# Altium PCB ALTIUM.PCBDOC
Units mm, origin at the board's own origin, x right, y up, seen from the top; angles counter-clockwise.
Board outline 109.8 x 50 mm, 2 copper layers (Top Layers, Bottom Layer), stack 1.62 mm thick; 3 components, 0 nets, 0 pads, 0 vias.
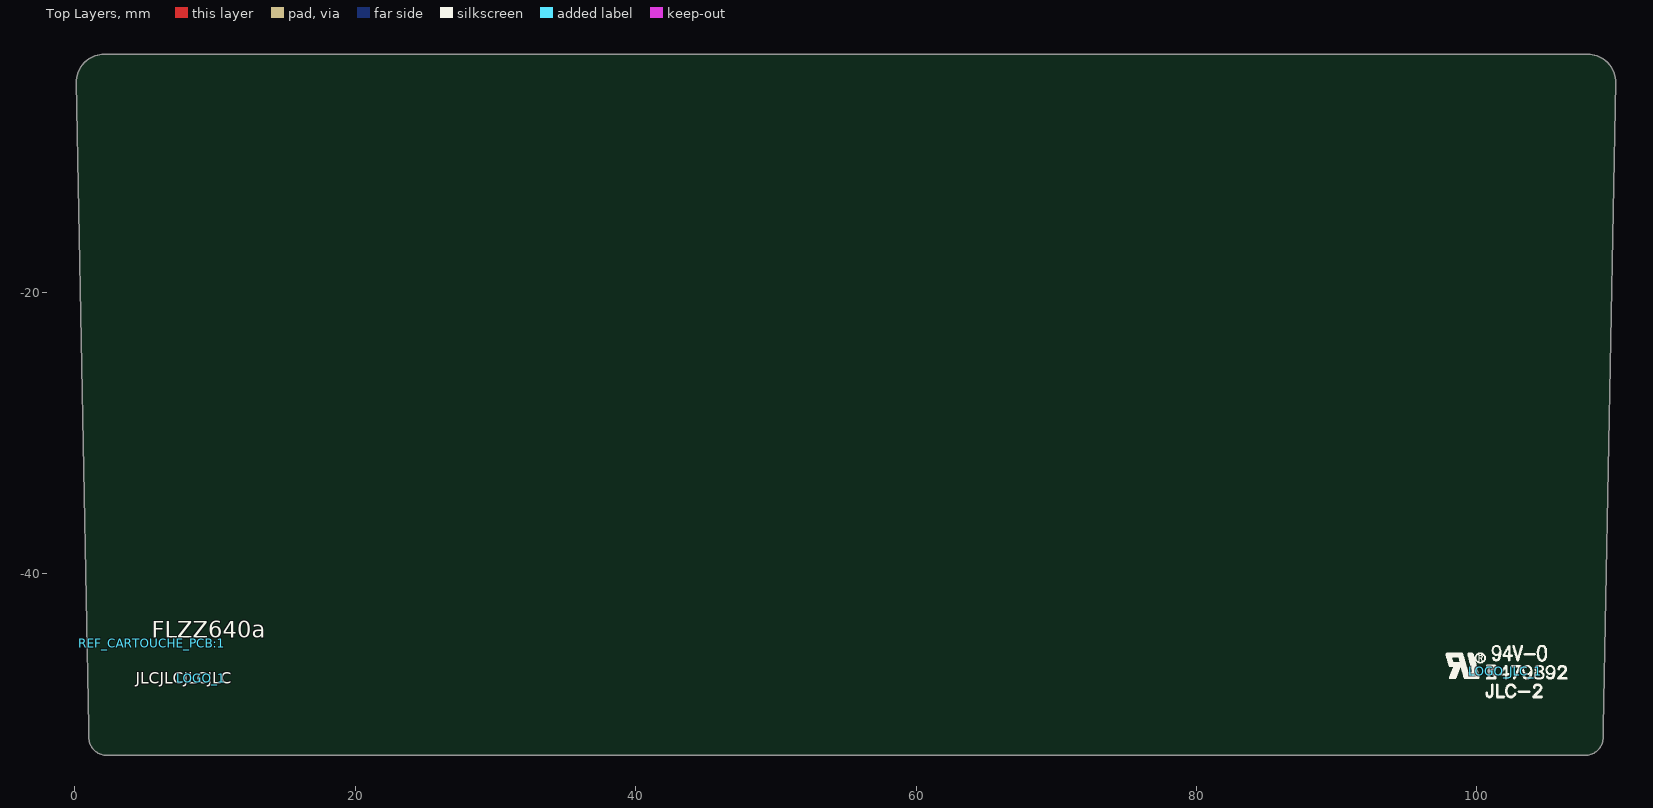
[diagram p0: Top Layers view]
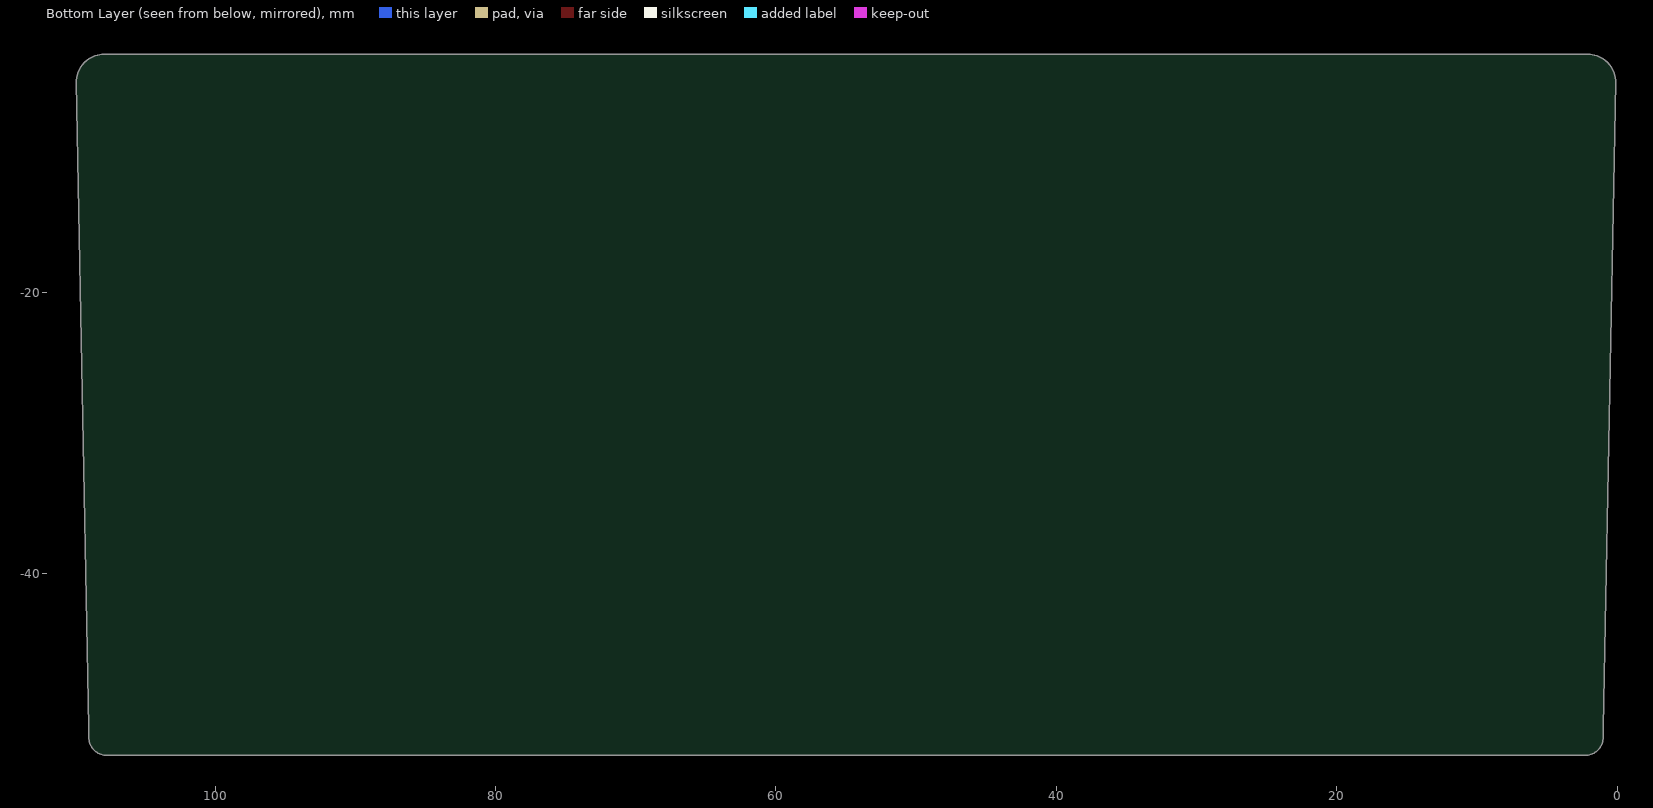
[diagram p1: Bottom Layer view, seen from below]

## Layer stack, top to bottom
Top Solder: solder mask 0.018, Solder Resist, Dk 3.5
Top Layers: signal copper 0.035
Dielectric 1: core 1.55, FR-4, Dk 4.2
Bottom Layer: signal copper 0.035
Solder Side: solder mask 0.018, Solder Resist, Dk 3.5

## Board outline
1,-51.73 1,-51 0.1,-5 cw(c2.1,-5) 2.1,-3 107.9,-3 cw(c107.9,-5) 109.9,-5 109,-51 109,-51.73 cw(c107.73,-51.73) 107.73,-53 2.27,-53 cw(c2.27,-51.73)

## Design rules (kind name [scope] priority, off if disabled: settings)
AcuteAngle [All] p1: minimum=1.50000000000000E+0001 checktracksonly=TRUE
BoardOutlineClearance BoardOutlineClearance_NPTH [OnLayer('Multi-Layer')] p1: gap=0 ignorepadtopadclearanceinfootprint=FALSE
BoardOutlineClearance BoardOutlineClearance_TopOverlay [OnLayer('Top Overlay')] p2: gap=0 ignorepadtopadclearanceinfootprint=FALSE
BoardOutlineClearance [All] p3: gap=0.4 ignorepadtopadclearanceinfootprint=FALSE
Clearance Clearance_HOLE_NO_PLATED [(PadIsPlated = 'False')] p1: gap=0.25 ignorepadtopadclearanceinfootprint=FALSE
Clearance Clearance_Keep-Out_rainurage [OnLayer('Keep-Out Layer')] p2: gap=0.45 ignorepadtopadclearanceinfootprint=FALSE
Clearance Clearance_Keep-Out_multi [OnLayer('Signal Layer 1 , Signal Layer 2') vs OnLayer('Keep-Out Layer')] p3 off: gap=0.5 ignorepadtopadclearanceinfootprint=FALSE
Clearance Clearance_Polygon [IsRegion] p4: gap=0.2 ignorepadtopadclearanceinfootprint=FALSE
Clearance Clearance_Keep-Out [OnLayer('Keep-Out Layer')] p5: gap=0.2 ignorepadtopadclearanceinfootprint=FALSE
Clearance Clearance_All [All] p6: gap=0.15 ignorepadtopadclearanceinfootprint=FALSE
ComponentClearance [All] p1: gap=0.254 collisioncheckmode=3 verticalgap=-0.1 showdistances=FALSE
ComponentOrientations [All] p1: allowedrotations=32
Height [All] p1: minheight=0 maxheight=1000 prefheight=12.7
HoleSize "Connecteur de programmation" [HasFootprint('CON-PIC')] p1: absolutevalues=TRUE maxlimit=0.4 minlimit=0.4 maxpercent=80.000 minpercent=20.000
HoleSize [All] p2: absolutevalues=TRUE maxlimit=10 minlimit=0.25 maxpercent=80.000 minpercent=20.000
HoleToHoleClearance HoleToHoleClearance_NTPH [(PadIsPlated = 'False') vs (PadIsPlated = 'False')] p1: gap=0.15 allowstackedmicrovias=TRUE
HoleToHoleClearance [All] p2: gap=0.254 allowstackedmicrovias=TRUE
MaximumViaCount [All] p1: limit=1000
MinimumAnnularRing "Minimum IAR  >0.45mm" [((ObjectKind = 'Pad') OR (ObjectKind = 'Via')) And (Layer = 'MultiLayer') And (HoleDiameter > AsMM(0.45))] p1: minimumring=0.125 // minimum inner annular ring for pads > 0.45mm finished hole size
MinimumAnnularRing "Minimum IAR <=0.45mm" [((ObjectKind = 'Pad') OR (ObjectKind = 'Via')) And (Layer = 'MultiLayer') And (HoleDiameter <= AsMM(0.45))] p2: minimumring=0.125 // minimum inner annular ring for pads <= 0.45mm finished hole size
MinimumSolderMaskSliver [All] p1: minsoldermaskwidth=0
NetsToIgnore [All] p1:
PlaneClearance [All] p1: clearance=0
PlaneConnect [All] p1: planeconnectstyle=Direct reliefexpansion=0.508 reliefentries=4 reliefconductorwidth=0.254 reliefairgap=0.254
PolygonConnect PolygonConnect_GND [InNet('GND')] p1: thpad.connectstyle=Relief thpad.reliefconductorwidth=0.254 thpad.reliefentries=4 thpad.polygonreliefangle="90 Angle" thpad.airgapwidth=0.254 smdpad.connectstyle=Relief smdpad.reliefconductorwidth=0.254 smdpad.reliefentries=4 smdpad.polygonreliefangle="90 Angle" smdpad.airgapwidth=0.254 via.connectstyle=Direct via.reliefconductorwidth=0.254 via.reliefentries=4 via.polygonreliefangle="90 Angle" via.airgapwidth=0.254
PolygonConnect PolygonConnect_ALL [All] p2: thpad.connectstyle=Direct thpad.reliefconductorwidth=0.254 thpad.reliefentries=4 thpad.polygonreliefangle="90 Angle" thpad.airgapwidth=0.254 smdpad.connectstyle=Relief smdpad.reliefconductorwidth=0.5 smdpad.reliefentries=4 smdpad.polygonreliefangle="90 Angle" smdpad.airgapwidth=0.254 via.connectstyle=Direct via.reliefconductorwidth=0.254 via.reliefentries=4 via.polygonreliefangle="90 Angle" via.airgapwidth=0.254
RoutingCorners [All] p1: cornerstyle=45-Degree minsetback=0.127 maxsetback=0.127
RoutingPriority [All] p1: routingpriority=1
RoutingVias [All] p1: holewidth=0.25 width=0.6 viastyle="Through Hole" minholewidth=0.25 minwidth=0.6 maxholewidth=0.5 maxwidth=1.1 useviatemplates=TRUE viatemplateguid#1={0E8BA5E2-6859-438A-973D-D7DBD7613DBF} viatemplateguid#2={6DD6BBB8-B2F0-415C-B1CE-17339D3477FC} viatemplateguid#3={7217E559-52BF-4437-9AEC-43B92D07F22D} viatemplateguid#4={5EE3409C-9A93-4FAD-B326-B90D2B5AF2CC} viatemplateguid#5={3166F2FE-F73D-402A-83CC-7735AC987CAA} viatemplatename#1=LIB_Via60x25 viatemplatename#2=LIB_Via75x35 viatemplatename#3=LIB_Via100x50 viatemplatename#4=LIB_Via150x75 viatemplatename#5=LIB_Via200x100
SMDEntry [All] p1: side=TRUE corner=TRUE anyangle=TRUE
SMDNeckDown [All] p1: percent=100.000
ShortCircuit ShortCircuit_CutoutRegion_NPTH [(ObjectKind = 'Region') And (Layer = 'MultiLayer') And (IsCutoutRegion = 'False') vs (ObjectKind = 'Pad') And (Layer = 'MultiLayer') And (PadIsPlated = 'False')] p1: allowed=TRUE
SilkToSilkClearance [All] p1: silktosilkclearance=0.2
SilkToSolderMaskClearance [IsPad and InAnyComponent] p1: minsilkscreentomaskgap=0.2 clearancetoexposedcopper=TRUE
SolderMaskExpansion [All] p1: expansion=0.05 istentingtop=FALSE
UnRoutedNet [All] p1: checkbadconnections=TRUE
ViasUnderSMD [All] p1: allowed=FALSE
Width All [All] p1: maxlimit=10 minlimit=0.21 preferedwidth=0.21
17 further rules are at their usual default settings.

## Components (designator, comment, footprint, x,y, rotation, side; value= is the part's Value field where it differs from the comment)
LOGO_1 "LOGO_JLC_ORDER_NUMBER" JLC_ORDER_NUMBER 9,-47.5 r0 top
LOGO_JLC_1 "LOGO_JLC_UL_2_LAYERS" LOGO_UL_JLC2 102,-47 r0 top
REF_CARTOUCHE_PCB:1 "FLZZ640a" LogoRefCuivre 5.5,-45 r0 top

## Footprints (in the part's own frame and the unit in brackets; to place one, negate y for a bottom-side part, rotate by r counter-clockwise, add the part's x,y. Pads: shape width x height; smd on the part's side, far side on the other; paste and mask are expansions set on the pad)
JLC_ORDER_NUMBER [mm] "Numero de commande JLCPCB"
LOGO_UL_JLC2 [mm] "Logo UL pour PCB single/double layer"
  silkscreen extent -4.24,-1.92 4.46,1.86
LogoRefCuivre [mm]

## Part data
LOGO_1 LOGO_JLC_1: "Logo CE (sérigraphie)"
REF_CARTOUCHE_PCB:1: library part LOGO_Cuivre, "Référence Cuivre (sérigraphie)"

## Nets (pads, with @x,y where several pads share a name; then routed paths per layer and width w, separated by ;. In a path a pad name is that pad's centre, name@x,y a point inside that pad or via, vN(x,y) a via of type N, cw(c..) or ccw(c..) an arc to the next point about the centre after c; other vN are vias at no path point)

## Silkscreen, mask and mechanical layers (free items; w line width, h text height)
1_BOARD_OUTLINE:
  the board outline again, w0.203

## Dimensions
107.73,-53 to 107.9,-3 on 15_Dimensions
0.1,-5 to 109.9,-5 on 15_Dimensions
1,-51.73 to 109,-51.73 on 15_Dimensions

## Text inside footprints (layer, text, board x,y; h text height)
LOGO_1: Top Overlay "JLCJLCJLCJLC" at 4.335,-47.9 h0.8